# Altium PCB PCB1.PcbDoc
Units mil, origin at the board's own origin, x right, y up, seen from the top; angles counter-clockwise.
Board outline 2425 x 1770 mil, 2 copper layers (Top Layer, Bottom Layer); 4 components, 4 nets, 8 pads, 0 vias.
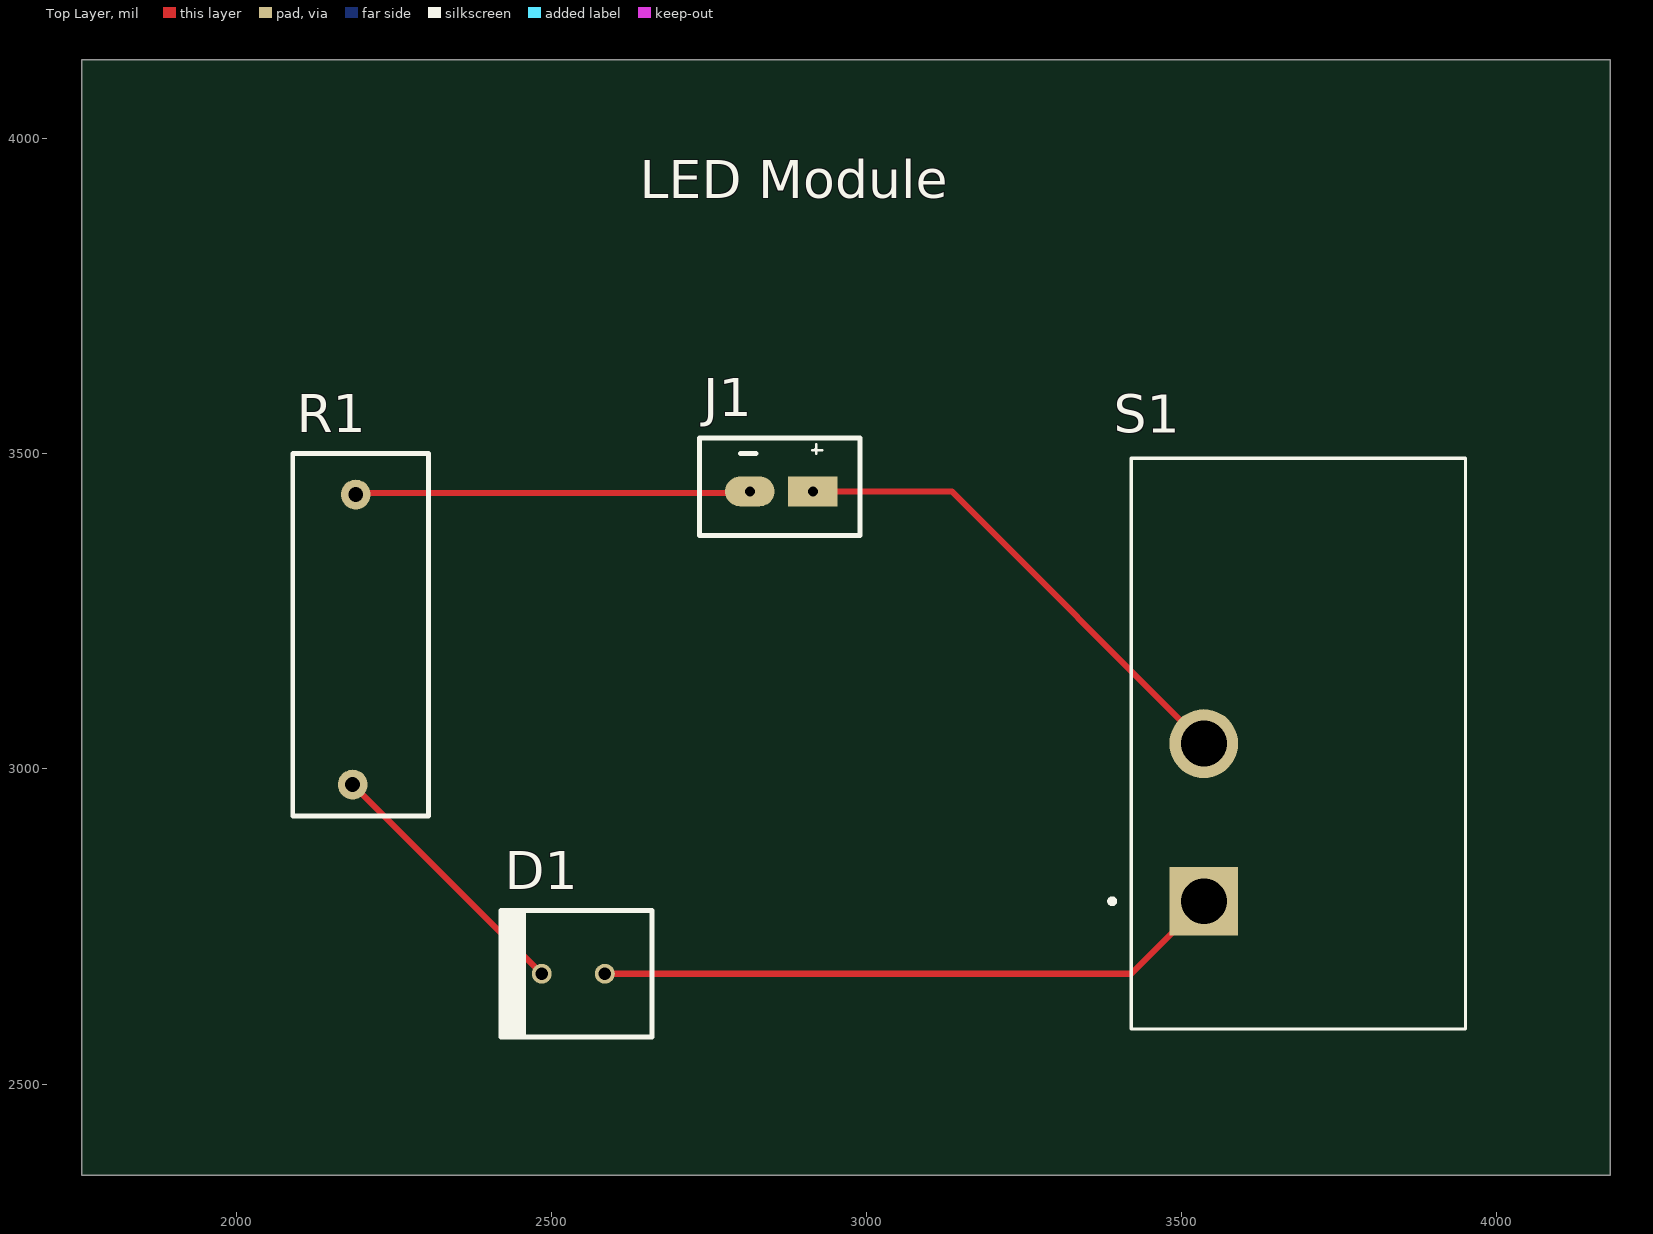
[diagram p0: Top Layer view]
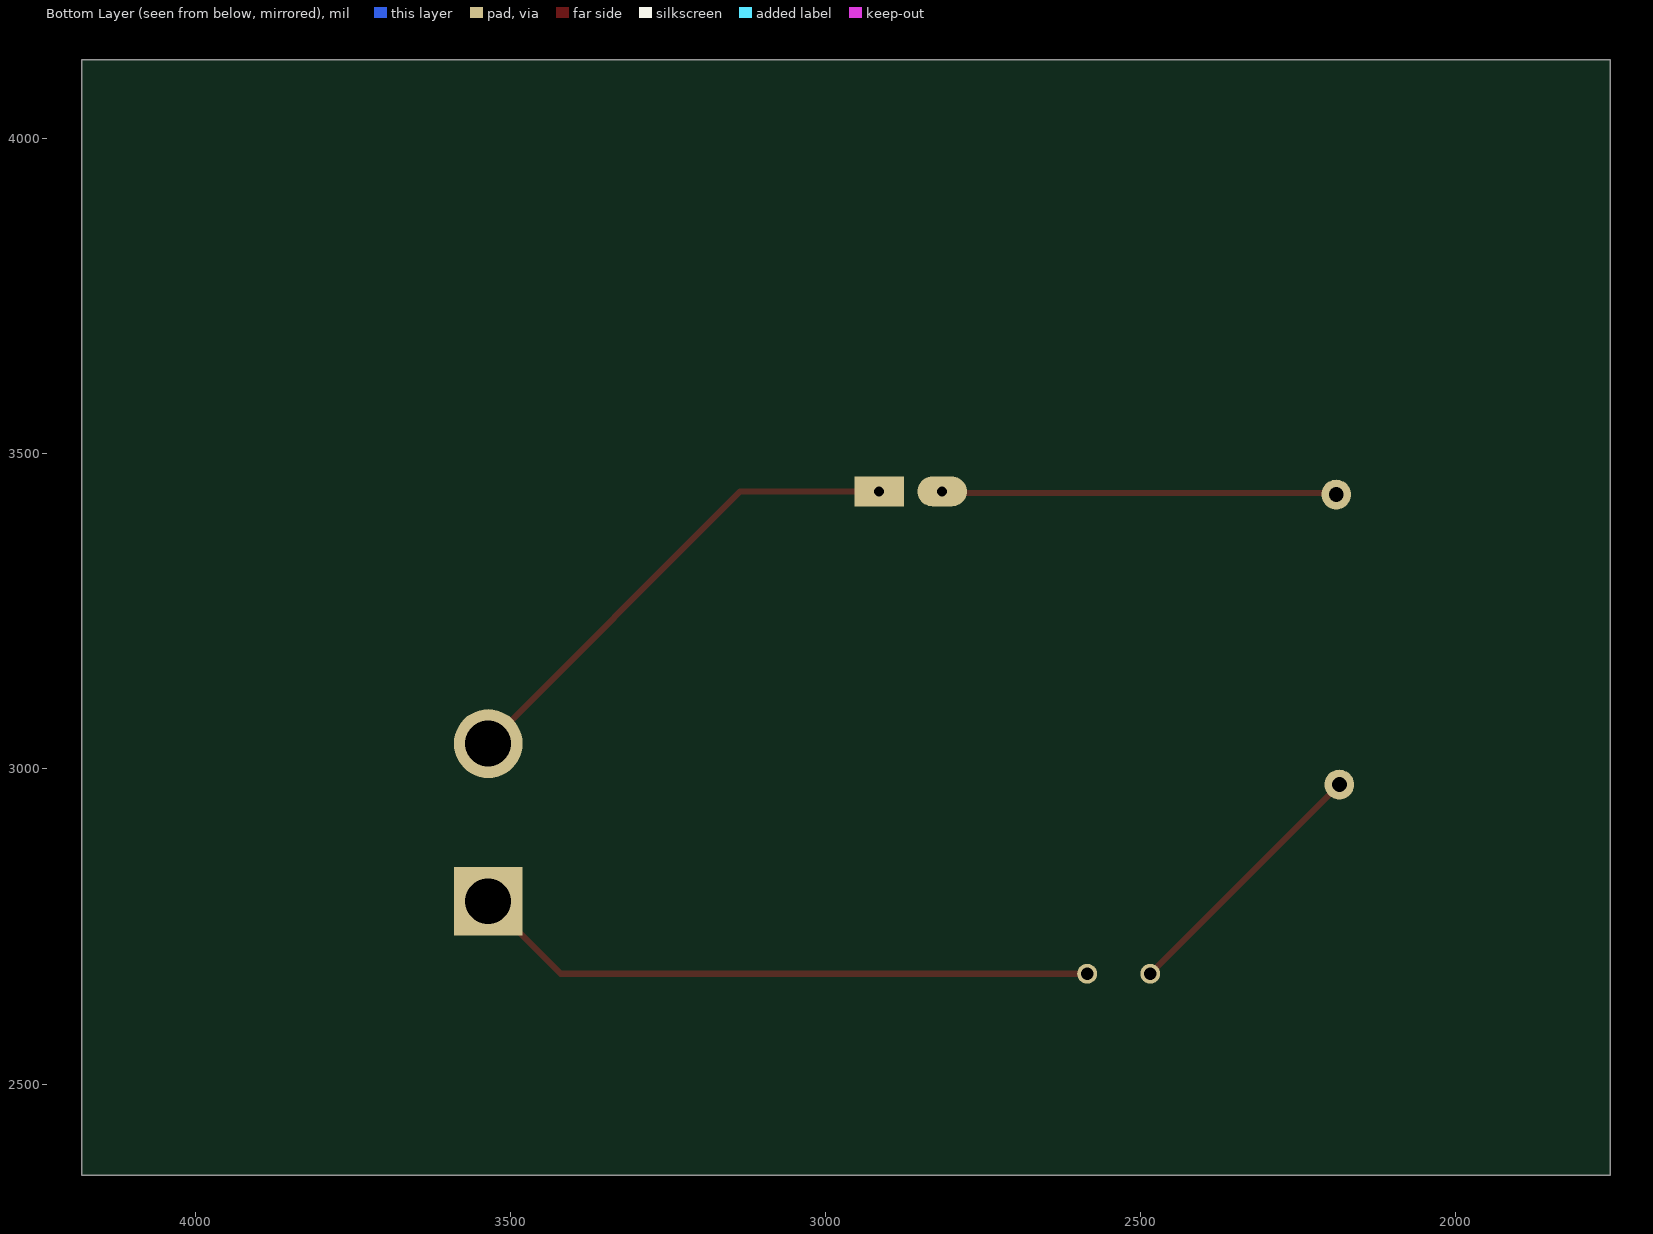
[diagram p1: Bottom Layer view, seen from below]
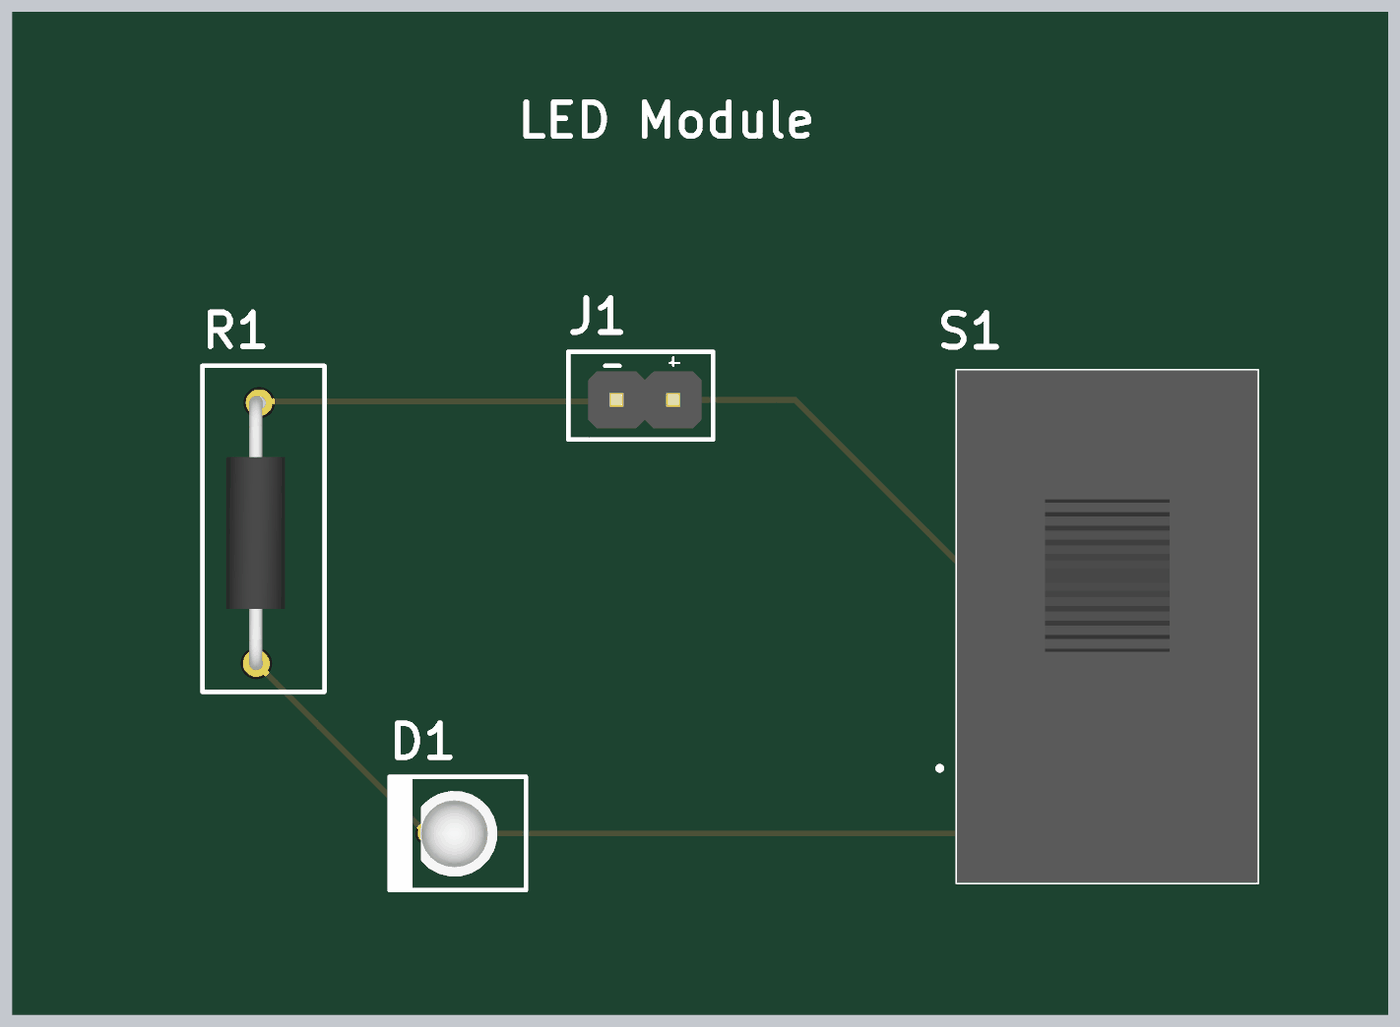
[diagram p2: 3D render of the assembled board from above, using the file's embedded part models]

## Layer stack, top to bottom
Top Solder: solder mask 0.4, Solder Resist, Dk 3.5
Top Layer: signal copper 1.4
Dielectric 1: dielectric 12.6, FR-4, Dk 4.8
Bottom Layer: signal copper 1.4
Bottom Solder: solder mask 0.4, Solder Resist, Dk 3.5

## Board outline
1755,2355 4180,2355 4180,4125 1755,4125

## Design rules (kind name [scope] priority, off if disabled: settings)
Clearance [All] p1: gap=10 ignorepadtopadclearanceinfootprint=FALSE
PolygonConnect [All] p1: connectstyle=Relief reliefconductorwidth=10 reliefentries=4 polygonreliefangle="90 Angle" airgapwidth=10
RoutingVias [All] p1: holewidth=28 width=50 viastyle="Through Hole" minholewidth=28 minwidth=50 maxholewidth=28 maxwidth=50
SolderMaskExpansion [All] p1: expansion=4 istentingtop=FALSE
Width [All] p1: maxlimit=10 minlimit=10 preferedwidth=10
30 further rules are at their usual default settings.

## Components (designator, comment, footprint, x,y, rotation, side; value= is the part's Value field where it differs from the comment)
D1 "151031VS06000" LED 2585,2675 r180 top
J1 "PPPC021LFBN-RC" HEAD 2915,3440 r180 top
R1 "MFR-25FRF52-10K" RES 2185,2975 r90 top value=10kR
S1 "S201031MS02Q" SW_S101031MS02Q 3685,3040 r0 top

## Footprints (in the part's own frame and the unit in brackets; to place one, negate y for a bottom-side part, rotate by r counter-clockwise, add the part's x,y. Pads: shape width x height; smd on the part's side, far side on the other; paste and mask are expansions set on the pad)
HEAD [mm]
  rect 2x1.2 hole 0.4: 1(0,0)
  oval 2x1.2 hole 0.4: 2(2.54,0)
  silkscreen extent -1.91,-2.16 4.57,1.78, body extent -1.4,-1.27 3.68,1.27, height 8.38
LED [mm]
  round 0.8 hole 0.5: 1(0,0) 2(2.54,0)
  silkscreen extent -1.91,-2.54 4.19,2.54, body extent -0.64,-1.91 2.94,1.93, height 6.57
RES [mm]
  round 1.2 hole 0.6: 1(0,0) 2(11.684,-0.127)
  silkscreen extent -1.27,-3.05 13.33,2.41, body extent -0.31,-1.27 11.99,1.33, height 2.62
SW_S101031MS02Q [mm]
  rect 2.775x2.775 / inner round 2.775 / far side rect 2.775x2.775 hole 1.85: 1(-3.81,-6.35)
  round 2.775 hole 1.85: 2(-3.81,0)
  silkscreen extent -7.6,-11.5 6.73,11.5, body extent -6.73,-11.49 6.73,11.49, height 18.41

## Part data
D1: "Single Color LED, Bright Green, Diffused, T-1, 3mm", Color=Green, Forward Current=30mA, Manufacturer="Wurth Electronics", Max Operating Temperature=85°C, Min Operating Temperature=-40°C, Supplier Part Number=8154388P, Category=LEDs, Channels=1, ComponentLink1Description=https://datasheet.ciiva.com:443/pdfs/VipMasterIC/IC/MIDC/MIDC-S-A0001524573/MIDC-S-A0001524573-1.pdf?src-supplier=IHS+Markit, ComponentLink1URL=https://datasheet.ciiva.com:443/pdfs/VipMasterIC/IC/MIDC/MIDC-S-A0001524573/MIDC-S-A0001524573-1.pdf?src-supplier=IHS+Markit, ComponentLink2Description=https://datasheet.ciiva.com/22657/151031vs06000-22657015.pdf?src-supplier=Element14, ComponentLink2URL=https://datasheet.ciiva.com/22657/151031vs06000-22657015.pdf?src-supplier=Element14, ComponentLink3Description=https://datasheet.ciiva.com/29363/759487-da-01-en-tht-led-3mm-b-gruen-151031vs06000-29363829.pdf?src-supplier=Conrad, ComponentLink3URL=https://datasheet.ciiva.com/29363/759487-da-01-en-tht-led-3mm-b-gruen-151031vs06000-29363829.pdf?src-supplier=Conrad, Lens Style=Diffused, Luminous Intensity-Nom=30mcd, Manufacturer Part Number=151031VS06000, Mounting Technology=Radial, Optoelectronic Device Type="SINGLE COLOR LED", Overall Height=5.3mm, Packaging=Bulk, Pins=2, Pricing="200=0.098, 500=0.085, 1000=0.08, 2000=0.076 (GBP)", Reach SVHC Compliant=Yes, RoHS=Yes, RoHS Compliant=Yes, Shape=Round, Size=3mm, Stock=2549, Supplier=Rs, T-code=T-1, Terminal Pitch=2.54mm, Viewing Angle=60°
J1: "Board Connector, 2 Contact(s), 1 Row(s), Female, Straight, 0.1 inch Pitch, Solder Terminal, Locking", Manufacturer=Sullins, Manufacturer Series=PP, Rated Current (Signal)=3A, Supplier Part Number=S7035-ND, Body Breadth=0.094inch, Body Depth=0.334inch, Body Length=0.22inch, Category=Connectors, ComponentLink1Description=https://datasheet.ciiva.com:443/pdfs/VipMasterIC/IC/SUCS/SUCSS00270/SUCSS00270-1.pdf?src-supplier=IHS+Markit, ComponentLink1URL=https://datasheet.ciiva.com:443/pdfs/VipMasterIC/IC/SUCS/SUCSS00270/SUCSS00270-1.pdf?src-supplier=IHS+Markit, ComponentLink2Description=https://media.digikey.com/pdf/Data%20Sheets/Sullins%20PDFs/Female_Headers.100_DS.pdf?src-supplier=Digikey, ComponentLink2URL=https://media.digikey.com/pdf/Data%20Sheets/Sullins%20PDFs/Female_Headers.100_DS.pdf?src-supplier=Digikey, ComponentLink3Description=http://www.sullinscorp.com/catalogs/78_Page80-81_HEADER_.100_2.54mm_FEMALE.pdf?src-supplier=Future+Electronics, ComponentLink3URL=http://www.sullinscorp.com/catalogs/78_Page80-81_HEADER_.100_2.54mm_FEMALE.pdf?src-supplier=Future+Electronics, ComponentLink4Description=https://datasheet.octopart.com/PPPC021LFBN-RC-Sullins-datasheet-41308905.pdf?src-supplier=Future+Electronics, ComponentLink4URL=https://datasheet.octopart.com/PPPC021LFBN-RC-Sullins-datasheet-41308905.pdf?src-supplier=Future+Electronics, Connector Type="BOARD CONNECTOR", Contact Finish - Mating=AU, Contact Gender=Female, Contact Material=Bronze, Contact Pattern=RECTANGULAR, Contact Style="SQ PIN-SKT", Insulation Material=Polyester, Manufacturer Part Number=PPPC021LFBN-RC, Mating Contact Pitch=0.1inch, Mounting Option 1=LOCKING, Mounting Style=STRAIGHT, Mounting Technology=Board, Number Of Connectors=1, Number of Contacts=2, Number Of PCB Rows=1, Number of Rows Loaded=1, PCB Contact Pattern=RECTANGULAR, Polarization Key="POLARIZED HOUSING", Pricing="1=0.34, 10=0.287, 100=0.223, 500=0.1911, 1000=0.15925, 5000=0.1365, 10000=0.13 (USD)", Reach SVHC Compliant=Yes, Reference Standard=UL, Reliability=COMMERCIAL, RoHS=Yes, RoHS Compliant=Yes, Stock=20345, Supplier=Digikey, Terminal Length=0.125inch, Terminal Pitch=2.54mm, Termination=Solder
R1: "Fixed Resistor, Metal Film, 0.25W, 10000ohm, 250V, 1% +/-Tol, 100ppm/Cel, Through Hole Mount", Manufacturer=Yageo, Max Operating Temperature=155°C, Min Operating Temperature=-55°C, Package Diameter=2.4mm, Package Length=6.3mm, Package Shape=Tubular, Package Style=AxialMeter, Power=250mW, Rated Temperature=70°C, Resistor Type="FIXED RESISTOR", Supplier Part Number=3739323, Temperature Coefficient=100ppm/°C, Tolerance=1%, Working Voltage=250V, Category="Through-Hole Resistors", ComponentLink1Description=https://datasheet.ciiva.com:443/pdfs/VipMasterIC/IC/YAGO/YAGO-S-A0009358480/YAGO-S-A0009358480-1.pdf?src-supplier=IHS+Markit, ComponentLink1URL=https://datasheet.ciiva.com:443/pdfs/VipMasterIC/IC/YAGO/YAGO-S-A0009358480/YAGO-S-A0009358480-1.pdf?src-supplier=IHS+Markit, ComponentLink2Description=https://datasheet.ciiva.com/25645/yageolr-mfr-2013-25645549.pdf?src-supplier=Digikey, ComponentLink2URL=https://datasheet.ciiva.com/25645/yageolr-mfr-2013-25645549.pdf?src-supplier=Digikey, Construction=Cylindrical, JESD-609 Code=e3, Lead Diameter=0.55mm, Lead Length=28mm, Manufacturer Part Number=MFR-25FRF52-10K, Mounting Technology="Through Hole", Packaging="Tape and Reel", Pins=2, Pricing="5000=0.0088, 20000=0.0085, 50000=0.0083, 125000=0.0081, 200000=0.0078 (USD)", Reach SVHC Compliant=Yes, RoHS=Yes, RoHS Compliant=Yes, Stock=195000, Supplier="Future Electronics", Technology="METAL FILM", Terminal Finish=Tin, Termination=Wire
S1: "Slide Switch, 4 Positions, DPST, Latched, 1A, 125VDC, 6 PCB Hole Cnt, Solder Terminal, Through Hole-straight", Actuator Color=Black, Contact AC Max Rating R Load=6A@250VAC, Contact Current(AC)-Max=6A, Contact Current(DC)-Max=1A, Contact DC Max Rating R Load=1A@125VDC, Contact Resistance=0.01mR, Contact Voltage(AC)-Max=250V, Contact Voltage(DC)-Max=125V, Dielectric Withstand Volts=1000VRMSV, Insulation Resistance=1GR, Manufacturer="ITT C&K", Manufacturer Series=S, Max Operating Temperature=65°C, Min Operating Temperature=-30°C, Actuator Finish=Matte, Actuator Length=0.335inch, Actuator Material=Nylon, Actuator Type="HIGH TYPE", Body Breadth=13.46inch, Body Height=7.11mm, Body Length or Diameter=22.99mm, Category="Slide Switches", Center Contact Plating=Silver, ComponentLink1Description=https://datasheet.ciiva.com:443/pdfs/VipMasterIC/IC/CKCI/CKCI-S-A0001796527/CKCI-S-A0001796673-1.pdf?src-supplier=IHS+Markit, ComponentLink1URL=https://datasheet.ciiva.com:443/pdfs/VipMasterIC/IC/CKCI/CKCI-S-A0001796527/CKCI-S-A0001796673-1.pdf?src-supplier=IHS+Markit, ComponentLink2Description=https://datasheet.ciiva.com/2889/s-4mar15-2889249.pdf?src-supplier=Digikey, ComponentLink2URL=https://datasheet.ciiva.com/2889/s-4mar15-2889249.pdf?src-supplier=Digikey, ComponentLink3Description=https://datasheet.ciiva.com/8627/s-4mar15-8627420.pdf?src-supplier=Avnet, ComponentLink3URL=https://datasheet.ciiva.com/8627/s-4mar15-8627420.pdf?src-supplier=Avnet, ComponentLink4Description=https://datasheet.ciiva.com/16174/s-30jul14-16174574.pdf?src-supplier=Onlinecomponents.com, ComponentLink4URL=https://datasheet.ciiva.com/16174/s-30jul14-16174574.pdf?src-supplier=Onlinecomponents.com, Contact Material=Copper, Electrical Life=10000Cycles, End Contact Material=Copper, End Contact Plating=Silver, Housing Material=Nylon, JESD-609 Code=e4, Manufacturer Part Number=S201031MS02Q, Mounting Technology="Through Hole", Number of Positions=4, PCB Hole Count=6, Pricing="1=1.238 (USD)", Reach SVHC Compliant=Yes, RoHS=Yes, RoHS Compliant=Yes, Stock=15, Supplier="Arrow Electronics", Supplier Part Number=S201031MS02Q, Switch Action=LATCHED, Switch Function=DPST, Switch Type="Slide Switch", Terminal Finish=Silver, Terminal Length=0.25inch, Terminal Material=Copper, Termination=Solder

## Nets (pads, with @x,y where several pads share a name; then routed paths per layer and width w, separated by ;. In a path a pad name is that pad's centre, name@x,y a point inside that pad or via, vN(x,y) a via of type N, cw(c..) or ccw(c..) an arc to the next point about the centre after c; other vN are vias at no path point)
+5: J1.1 S1.2 | length 785.7
  Top Layer w10: J1.1 3135,3440 S1.2
GND: J1.2 R1.2 | length 627.1
  Top Layer w10: R1.2 2192.5,3437.5 2812.5,3437.5 J1.2
NetD1_1: D1.1 S1.1 | length 997.6
  Top Layer w10: D1.1 3420,2675 S1.1
NetD1_2: D1.2 R1.1 | length 424.3
  Top Layer w10: R1.1 D1.2

## Silkscreen, mask and mechanical layers (free items; w line width, h text height)
Top Overlay:
  text "LED Module" at 2640,3905 h60